# EAGLE board CT_schematic (EAGLE 7.6.0)

Size 100 x 80 mm. Coordinates in mm from the lower left corner, seen from the top.
Outline: 0,0 100,0 100,80 0,80 0,0
Copper layers (1*16): Top 0.035mm / dielectric 1.5mm / Bottom 0.035mm
Design rules "default": minimum track width 10mil, minimum drill 24mil, track to track 8mil, track to pad 8mil, pad to pad 8mil, via to via 8mil, smd to smd 8mil, copper to edge 40mil, drill to drill 8mil, minimum pad ring 10mil, minimum via ring 8mil, stop-mask expansion 4mil, vias tented up to drill 0mil, thermal gap 10mil

## Footprints (pad centres in the part's own frame; a part is rotated, then mirrored left to right if it is on the bottom)
C0603 = smd 0.8 x 0.8: 1 -0.762,0; 2 0.762,0
C0402 = smd 0.5 x 0.5: 1 -0.508,0; 2 0.508,0
C0805 = smd 1.2 x 1.3: 1 -1.016,0; 2 1.016,0
C1210 = smd 1.2 x 2.5: 1 -1.524,0; 2 1.524,0
R0603 = smd 0.8 x 0.8: 1 -0.762,0; 2 0.762,0
C1206 = smd 1.3 x 1.6: 1 -1.524,0; 2 1.524,0
L0603 = smd 0.8 x 0.8: 1 -0.762,0; 2 0.762,0
L1210 = smd 1.2 x 2.5: 1 -1.524,0; 2 1.524,0
DR1040 = smd 1.6 x 3.2: 1 -4.458,0; 2 4.458,0
UFBGA100 = smd 0.28 x 0.28: A1 -2.75,2.75; A2 -2.25,2.75; A3 -1.75,2.75; A4 -1.25,2.75; A5 -0.75,2.75; A6 -0.25,2.75; A7 0.25,2.75; A8 0.75,2.75; A9 1.25,2.75; A10 1.75,2.75; A11 2.25,2.75; A12 2.75,2.75; B1 -2.75,2.25; B2 -2.25,2.25; B3 -1.75,2.25; B4 -1.25,2.25; B5 -0.75,2.25; B6 -0.25,2.25; B7 0.25,2.25; B8 0.75,2.25; B9 1.25,2.25; B10 1.75,2.25; B11 2.25,2.25; B12 2.75,2.25; C1 -2.75,1.75; C2 -2.25,1.75; C3 -1.75,1.75; C4 -1.25,1.75; C5 -0.75,1.75; C8 0.75,1.75; C9 1.25,1.75; C10 1.75,1.75; C11 2.25,1.75; C12 2.75,1.75; D1 -2.75,1.25; D2 -2.25,1.25; D3 -1.75,1.25; D10 1.75,1.25; D11 2.25,1.25; D12 2.75,1.25; E1 -2.75,0.75; E2 -2.25,0.75; E3 -1.75,0.75; E10 1.75,0.75; E11 2.25,0.75; E12 2.75,0.75; F1 -2.75,0.25; F2 -2.25,0.25; F11 2.25,0.25; F12 2.75,0.25; G1 -2.75,-0.25; G2 -2.25,-0.25; G11 2.25,-0.25; G12 2.75,-0.25; H1 -2.75,-0.75; H2 -2.25,-0.75; H3 -1.75,-0.75; H10 1.75,-0.75; H11 2.25,-0.75; H12 2.75,-0.75; J1 -2.75,-1.25; J2 -2.25,-1.25; J3 -1.75,-1.25; J10 1.75,-1.25; J11 2.25,-1.25; J12 2.75,-1.25; K1 -2.75,-1.75; K2 -2.25,-1.75; K3 -1.75,-1.75; K4 -1.25,-1.75; K5 -0.75,-1.75; K8 0.75,-1.75; K9 1.25,-1.75; K10 1.75,-1.75; K11 2.25,-1.75; K12 2.75,-1.75; L1 -2.75,-2.25; L2 -2.25,-2.25; L3 -1.75,-2.25; L4 -1.25,-2.25; L5 -0.75,-2.25; L6 -0.25,-2.25; L7 0.25,-2.25; L8 0.75,-2.25; L9 1.25,-2.25; L10 1.75,-2.25; L11 2.25,-2.25; L12 2.75,-2.25; M1 -2.75,-2.75; M2 -2.25,-2.75; M3 -1.75,-2.75; M4 -1.25,-2.75; M5 -0.75,-2.75; M6 -0.25,-2.75; M7 0.25,-2.75; M8 0.75,-2.75; M9 1.25,-2.75; M10 1.75,-2.75; M11 2.25,-2.75; M12 2.75,-2.75
SOIC-8 = smd 1.6 x 0.6: 1 -2.7,1.905 | smd 1.55 x 0.6: 2 -2.7,0.635; 3 -2.7,-0.635; 4 -2.7,-1.905; 5 2.7,-1.905; 6 2.7,-0.635; 7 2.7,0.635; 8 2.7,1.905
TDFN-8/6MM = smd 0.3 x 0.75: 1 0,0; 2 0.5,0; 3 1,0; 4 1.5,0; 5 1.5,3; 6 1,3; 7 0.5,3; 8 0,3
182-009-MALE = drill 1.194 pad 1.524 octagon: 1 -5.537,10.923; 2 -2.769,10.923; 3 0,10.923; 4 2.769,10.923; 5 5.537,10.923; 6 -4.153,8.08; 7 -1.384,8.08; 8 1.384,8.08; 9 4.153,8.08 | hole 3.048: -12.446,9.501; 12.446,9.501
FCI_10118193-0001LF = smd 0.4 x 1.35: 1 -1.3,2.675; 2 -0.65,2.675; 3 0,2.675; 4 0.65,2.675; 5 1.3,2.675 | smd 1.6 x 1.4: 6 -3.2,2.45; 7 3.2,2.45 | smd 1.9 x 1.9: 8 -1.2,0; 9 1.2,0 | hole 0.5: -3.3,0; 3.3,0
SOT143B = smd 1 x 0.7: 1 -0.75,-1 | smd 0.6 x 0.7: 2 0.95,-1; 3 0.95,1; 4 -0.95,1
ABS07-32.768KHZ-7-T = smd 1.1 x 2.4: 1 -2.5,0; 2 0,0
ABLS-25.000MHZ-B2F-T = smd 5.6 x 2.8: 1 -3.81,0; 2 5.69,0
TSOT-23-5 = smd 1.3 x 0.62: 1 -1.31,0.95; 2 -1.31,0; 3 -1.31,-0.95; 4 1.31,-0.95; 5 1.31,0.95
DFN-8_DDB = smd 0.805 x 0.3: 1 -0.952,0.75; 2 -0.952,0.25; 3 -0.952,-0.25; 4 -0.952,-0.75; 5 0.952,-0.75; 6 0.952,-0.25; 7 0.952,0.25; 8 0.952,0.75 | smd 0.61 x 2.2: 9 0,0
DFN8_2X3MC = smd 0.813 x 0.305: 1 -1.398,0.75; 2 -1.398,0.25; 3 -1.398,-0.25; 4 -1.398,-0.75; 5 1.398,-0.75; 6 1.398,-0.25; 7 1.398,0.25; 8 1.398,0.75 | smd 1.753 x 1.549: 9 0,0
JST-2-SMD = smd 1 x 4.6: 1 -1,-3.7; 2 1,-3.7 | smd 1.6 x 3.4: NC1 -3.4,1.5; NC2 3.4,1.5
QFN-38_UHF = smd 0.75 x 0.3: 1 -2.4,2.75; 2 -2.4,2.25; 3 -2.4,1.75; 4 -2.4,1.25; 6 -2.4,0.25; 7 -2.4,-0.25; 8 -2.4,-0.75; 9 -2.4,-1.25; 10 -2.4,-1.75; 11 -2.4,-2.25; 12 -2.4,-2.75; 20 2.4,-2.75; 21 2.4,-2.25; 22 2.4,-1.75; 23 2.4,-1.25; 24 2.4,-0.75; 25 2.4,-0.25; 26 2.4,0.25; 27 2.4,0.75; 28 2.4,1.25; 29 2.4,1.75; 30 2.4,2.25; 31 2.4,2.75 | smd 0.758 x 0.3: 5 -2.4,0.75 | smd 0.3 x 0.75: 13 -1.5,-3.4; 14 -1,-3.4; 15 -0.5,-3.4; 16 0,-3.4; 17 0.5,-3.4; 18 1,-3.4; 19 1.5,-3.4; 32 1.5,3.4; 33 1,3.4; 34 0.5,3.4; 35 0,3.4; 36 -0.5,3.4; 37 -1,3.4; 38 -1.5,3.4 | smd 3.2 x 5.2: 39 0,0
IRF8306MTRPBF = smd 0.9 x 1.85: 1 0,0; 2 0,-2.35; 6 6.4,0; 7 6.4,-2.35 | smd 0.75 x 0.75: 3 1.75,-1.175 | smd 1.45 x 0.87: 4 3.5,-0.565; 5 3.5,-1.785
SW_4-1437565-2 = smd 1.4 x 2.1: 1 -2.23,4.55; 2 -2.23,-4.55; 3 2.23,4.55; 4 2.23,-4.55
LGM67K-G1J2-24-Z = smd 0.8 x 1.4: A -2,0; C 0,0
NC7SZ125M5X = smd 1.3 x 0.7: 1 -1.3,0.95; 2 -1.3,0; 3 -1.3,-0.95; 4 1.3,-0.95; 5 1.3,0.95

## Placement (x,y rotation side)
C1  1e-06  [C0603]  -49.53,78.74 0 top  (outside the outline)
C2  1e-07  [C0603]  -53.34,78.74 0 top  (outside the outline)
C3  1e-07  [C0603]  -57.15,78.74 0 top  (outside the outline)
C4  1e-07  [C0603]  -60.96,78.74 0 top  (outside the outline)
C5  1e-07  [C0603]  -64.77,78.74 0 top  (outside the outline)
C6  1e-07  [C0603]  -68.58,78.74 0 top  (outside the outline)
C7  1e-07  [C0603]  -72.39,78.74 0 top  (outside the outline)
C8  4.7e-06  [C0603]  -34.29,78.74 0 top  (outside the outline)
C9  1e-08  [C0603]  -76.2,78.74 0 top  (outside the outline)
C10  1e-06  [C0603]  -80.01,78.74 0 top  (outside the outline)
C11  1e-07  [C0402]  -53.34,83.82 0 top  (outside the outline)
C12  1e-07  [C0402]  -57.15,83.82 0 top  (outside the outline)
C13  1e-11  [C0402]  -60.96,83.82 0 top  (outside the outline)
C14  1e-11  [C0402]  -64.77,83.82 0 top  (outside the outline)
C15  1e-11  [C0402]  -68.58,83.82 0 top  (outside the outline)
C16  1e-11  [C0402]  -72.39,83.82 0 top  (outside the outline)
C17  1e-06  [C0603]  -15.24,83.82 0 top  (outside the outline)
C18  1e-08  [C0402]  -76.2,83.82 0 top  (outside the outline)
C19  1e-08  [C0402]  -80.01,83.82 0 top  (outside the outline)
C20  1e-08  [C0402]  -83.82,83.82 0 top  (outside the outline)
C21  1e-08  [C0402]  -15.24,88.9 0 top  (outside the outline)
C22  1e-06  [C0603]  -19.05,83.82 0 top  (outside the outline)
C23  1e-06  [C0603]  -22.86,83.82 0 top  (outside the outline)
C24  1e-05  [C0805]  -21.59,62.23 0 top  (outside the outline)
C25  1e-05  [C0805]  -26.67,62.23 0 top  (outside the outline)
C26  1e-05  [C0805]  -31.75,62.23 0 top  (outside the outline)
C27  1e-05  [C0805]  -36.83,62.23 0 top  (outside the outline)
C28  1e-05  [C1210]  -48.26,55.88 0 top  (outside the outline)
C29  2.2e-06  [C0603]  -38.1,78.74 0 top  (outside the outline)
C30  2.2e-07  [C0603]  -41.91,78.74 0 top  (outside the outline)
C31  1e-05  [C0805]  -41.91,62.23 0 top  (outside the outline)
C32  1e-05  [C0805]  -46.99,62.23 0 top  (outside the outline)
C33  1e-07  [C0402]  -19.05,88.9 0 top  (outside the outline)
C34  2.2e-06  [C0603]  -45.72,78.74 0 top  (outside the outline)
C35  2.45e-08  [R0603]  -57.15,68.58 0 top  (outside the outline)
C36  2.8258362168397e-09  [R0603]  -76.2,62.23 0 top  (outside the outline)
C37  7.105e-09  [R0603]  -36.83,68.58 0 top  (outside the outline)
C38  1e-05  [C1206]  -73.66,55.88 0 top  (outside the outline)
C39  1e-05  [C1206]  -80.01,55.88 0 top  (outside the outline)
C40  1e-08  [C0402]  -22.86,88.9 0 top  (outside the outline)
F1  240.0  [L0603]  -26.67,83.82 0 top  (outside the outline)
I1  3.3e-05  [L1210]  -54.61,55.88 0 top  (outside the outline)
I2  7e-06  [DR1040]  -35.56,27.94 0 top  (outside the outline)
I3  1e-05  [L1210]  -60.96,55.88 0 top  (outside the outline)
I4  3.3e-05  [L1210]  -67.31,55.88 0 top  (outside the outline)
R2  1000.0  [R0603]  -30.48,83.82 0 top  (outside the outline)
R7  4700.0  [R0603]  -34.29,83.82 0 top  (outside the outline)
R8  2200.0  [R0603]  -38.1,83.82 0 top  (outside the outline)
R10  2200.0  [R0603]  -41.91,83.82 0 top  (outside the outline)
R12  10000.0  [R0603]  -62.23,68.58 0 top  (outside the outline)
R13  10000.0  [R0603]  -67.31,68.58 0 top  (outside the outline)
R14  10000.0  [R0603]  -72.39,68.58 0 top  (outside the outline)
R15  10000.0  [R0603]  -77.47,68.58 0 top  (outside the outline)
R16  10000.0  [R0603]  -82.55,68.58 0 top  (outside the outline)
R17  10000.0  [R0603]  -15.24,73.66 0 top  (outside the outline)
R18  10000.0  [R0603]  -20.32,73.66 0 top  (outside the outline)
R19  10000.0  [R0603]  -25.4,73.66 0 top  (outside the outline)
R20  10000.0  [R0603]  -30.48,73.66 0 top  (outside the outline)
R21  10000.0  [R0603]  -35.56,73.66 0 top  (outside the outline)
R22  10000.0  [R0603]  -40.64,73.66 0 top  (outside the outline)
R23  10000.0  [R0603]  -45.72,73.66 0 top  (outside the outline)
R24  120.0  [R0603]  -45.72,83.82 0 top  (outside the outline)
R25  1000000.0  [R0603]  -81.28,62.23 0 top  (outside the outline)
R26  1000000.0  [R0603]  -16.51,68.58 0 top  (outside the outline)
R27  490000.0  [R0603]  -41.91,68.58 0 top  (outside the outline)
R28  1000000.0  [R0603]  -21.59,68.58 0 top  (outside the outline)
R29  100000.0  [R0603]  -46.99,68.58 0 top  (outside the outline)
R30  560000.0  [R0603]  -52.07,68.58 0 top  (outside the outline)
R31  1000000.0  [R0603]  -26.67,68.58 0 top  (outside the outline)
R32  1000000.0  [R0603]  -31.75,68.58 0 top  (outside the outline)
R33  10000.0  [R0603]  -50.8,73.66 0 top  (outside the outline)
R34  75000.0  [R0603]  -55.88,73.66 0 top  (outside the outline)
R35  10000.0  [R0603]  -60.96,73.66 0 top  (outside the outline)
R36  10000.0  [R0603]  -66.04,73.66 0 top  (outside the outline)
R37  95300.0  [R0603]  -71.12,73.66 0 top  (outside the outline)
R38  95300.0  [R0603]  -76.2,73.66 0 top  (outside the outline)
R39  10000.0  [R0603]  -81.28,73.66 0 top  (outside the outline)
R40  10000.0  [R0603]  -15.24,78.74 0 top  (outside the outline)
R41  10000.0  [R0603]  -20.32,78.74 0 top  (outside the outline)
R42  24000.0  [R0603]  -25.4,78.74 0 top  (outside the outline)
R43  2000.0  [R0603]  -49.53,83.82 0 top  (outside the outline)
R44  10000.0  [R0603]  -30.48,78.74 0 top  (outside the outline)
U1  STM32F412VGH6  [UFBGA100]  -25.4,27.94 0 top  (outside the outline)
U2  AT25080B-SSHL-T  [SOIC-8]  -24.13,38.1 0 top  (outside the outline)
U3  AT25320B-SSHL-T  [SOIC-8]  -40.64,38.1 0 top  (outside the outline)
U4  AT25512N-SH-T  [SOIC-8]  -54.61,38.1 0 top  (outside the outline)
U5  24AA08T-I/MNY  [TDFN-8/6MM]  -67.31,26.67 0 top  (outside the outline)
U6  MCP2562-E/SN  [SOIC-8]  -68.58,38.1 0 top  (outside the outline)
U7  182-009-113R531  [182-009-MALE]  -36.83,6.35 0 top  (outside the outline)
U8  10118193-0001LF  [FCI_10118193-0001LF]  -49.53,46.99 0 top  (outside the outline)
U9  prtr5v0u2ax  [SOT143B]  -41.91,88.9 0 top  (outside the outline)
U10  ABS07-32.768KHZ-7-T  [ABS07-32.768KHZ-7-T]  -27.94,55.88 0 top  (outside the outline)
U11  ABLS-25.000MHZ-B2F-T  [ABLS-25.000MHZ-B2F-T]  -77.47,46.99 0 top  (outside the outline)
U12  ltc3406es5  [TSOT-23-5]  -52.07,60.96 0 top  (outside the outline)
U13  ltc3406es5  [TSOT-23-5]  -58.42,60.96 0 top  (outside the outline)
U14  LT3494AEDDB#TRMPBF  [DFN-8_DDB]  -26.67,88.9 0 top  (outside the outline)
U15  ltc3406es5  [TSOT-23-5]  -64.77,60.96 0 top  (outside the outline)
U16  MCP73831T-2ACI/MC  [DFN8_2X3MC]  -45.72,87.63 0 top  (outside the outline)
U17  S2B-PH-SM4-TB(LF)(SN)  [JST-2-SMD]  -50.8,29.21 0 top  (outside the outline)
U18  LTC2928CUHF#PBF  [QFN-38_UHF]  -58.42,46.99 0 top  (outside the outline)
U19  IRF8306MTRPbF  [IRF8306MTRPBF]  -26.67,48.26 0 top  (outside the outline)
U20  IRF8306MTRPbF  [IRF8306MTRPBF]  -41.91,48.26 0 top  (outside the outline)
U21  4-1437565-2  [SW_4-1437565-2]  -67.31,6.35 0 top  (outside the outline)
U22  Q65110A2395  [LGM67K-G1J2-24-Z]  -36.83,55.88 0 top  (outside the outline)
U23  nc7sz125m5x  [NC7SZ125M5X]  -15.24,62.23 0 top  (outside the outline)

## Library data of the parts
C1-C40 F1 I1-I4 R2 R7 R8 R10 R12-R44 U1-U23 = circuit_tree

## Nets
CLK_CRYSTAL_U1_D1: C13.1 U1.D1 U10.1
CLK_CRYSTAL_U1_E1: C14.1 U1.E1 U10.2
CLK_CRYSTAL_U1_F1: C15.1 U1.F1 U11.1
CLK_CRYSTAL_U1_G1: C16.1 U1.G1 U11.2
GND: C1.2 C2.2 C3.2 C4.2 C5.2 C6.2 C7.2 C8.2 C9.2 C10.2 C11.2 C12.2 C13.2 C14.2 C15.2 C16.2 C17.2 C18.2 C19.2 C20.2 C21.2 C22.2 C23.2 C24.2 C25.1 C25.2 C26.2 C27.1 C27.2 C28.2 C29.2 C30.2 C31.2 C32.1 C32.2 C33.2 C34.2 C35.2 C36.2 C37.2 C38.2 C39.2 C40.2 R2.2 R12.2 R13.2 R25.2 R27.2 R31.2 R34.2 R37.2 R38.2 R39.2 R40.2 R41.2 R43.2 U1.B12 U1.D3 U1.F2 U1.F11 U1.F12 U1.J1 U1.K1 U2.4 U3.4 U4.4 U5.4 U6.2 U6.8 U7.5 U8.5 U8.6 U8.7 U8.8 U8.9 U9.1 U12.2 U13.2 U14.2 U14.9 U15.2 U16.6 U16.9 U17.2 U18.8 U18.9 U18.10 U18.12 U18.13 U18.24 U18.25 U18.30 U18.32 U18.39 U22.C U23.1 U23.3
INPUT_USBPOWER_5V: C17.1 C38.1 R44.2 U1.D10 U8.1 U9.4 U16.1 U16.2
NET_U1_A3: R8.1 U1.A3 U5.6
NET_U1_A4: R12.1 U1.A4
NET_U1_B3: R10.1 U1.B3 U5.5
NET_U1_C11: C12.1 U1.C11
NET_U1_E3: R14.1 U1.E3
NET_U1_H2: R7.1 U1.H2 U23.4
NET_U1_H3: R13.1 U1.H3
NET_U1_M1: C9.1 C10.1 F1.1 U1.L1 U1.M1
NET_U1_M11: U22.A
NET_U1_M12: U21.3 U21.4
NET_U2_3: R15.1 U2.3
NET_U2_7: R17.1 U2.7
NET_U3_3: R18.1 U3.3
NET_U3_7: R20.1 U3.7
NET_U4_3: R21.1 U4.3
NET_U4_7: R23.1 U4.7
NET_U6_6: R24.2 U6.6
NET_U7_2: R24.2 U6.6 U7.2
NET_U7_3: R24.1 U6.7 U7.3
NET_U12_1: U12.1
NET_U12_3: I1.1 U12.3
NET_U12_5: R25.1 R26.1 U12.5
NET_U12_ATNET_3: I1.2 R26.2
NET_U13_1: U13.1
NET_U13_3: I2.1 U13.3
NET_U13_5: R27.1 R28.1 U13.5
NET_U13_ATNET_3: I2.2 R28.2
NET_U14_1: I3.1 U14.1
NET_U14_5: R29.1 U14.5
NET_U14_6: R30.1 U14.6
NET_U14_8: C30.1 U14.8
NET_U15_1: U15.1
NET_U15_3: I4.1 U15.3
NET_U15_5: R31.1 R32.1 U15.5
NET_U15_ATNET_3: I4.2 R32.2
NET_U16_5: R44.1 U16.5
NET_U16_8: R43.1 U16.8
NET_U18_3: R40.1 U18.3
NET_U18_6: R37.1 U18.6
NET_U18_7: R38.1 U18.7
NET_U18_16: R39.1 R42.1 U18.16
NET_U18_18: R36.1 U18.18
NET_U18_19: R35.1 U18.19 U18.20
NET_U18_21: R33.1 R34.1 U18.21 U23.2
NET_U18_26: C36.1 U18.26
NET_U18_27: C35.1 U18.27
NET_U18_28: C37.1 U18.28
NET_U18_38: R41.1 U18.38
NET_U19_3: U18.2 U19.3
NET_U20_3: U18.37 U20.3
NET_U21_1: R2.1 U21.1 U21.2
PROC_CAN1_RX: U1.C9 U6.4
PROC_CAN1_TX: U1.B9 U6.1
PROC_SPI1_MISO: U1.A7 U2.2
PROC_SPI1_MOSI: U1.C5 U2.5
PROC_SPI1_NSS: R16.1 U1.A9 U2.1
PROC_SPI1_SCK: U1.A8 U2.6
PROC_SPI2_MISO: U1.J3 U4.2
PROC_SPI2_MOSI: U1.K2 U4.5
PROC_SPI2_NSS: R22.1 U1.L12 U4.1
PROC_SPI2_SCK: U1.B8 U4.6
PROC_SPI3_MISO: U1.C10 U3.2
PROC_SPI3_MOSI: U1.B6 U3.5
PROC_SPI3_NSS: R19.1 U1.M3 U3.1
PROC_SPI3_SCK: U1.B11 U3.6
PROC_USB_OTG_FS_DM: U1.B12 U8.2 U9.3
PROC_USB_OTG_FS_DP: U1.A12 U8.3 U9.2
VCC_3V7: C33.1 C34.1 C39.1 R33.2 R35.2 R36.2 R42.2 U16.3 U16.4 U17.1 U18.11 U18.22 U19.1 U19.2 U19.6 U19.7 U20.1 U20.2 U20.6 U20.7
VCC_S1_3V7: C24.1 C26.1 C28.1 I3.2 R29.2 U12.4 U13.4 U14.3 U14.4 U19.4 U19.5
VCC_S2_3V7: C31.1 U15.4 U20.4 U20.5
VCC_TIER1_1V2: C11.1 C25.2 I1.2 R26.2 U1.L11
VCC_TIER1_1V8: C1.1 C2.1 C3.1 C4.1 C5.1 C6.1 C7.1 C8.1 C18.1 C19.1 C20.1 C21.1 C23.1 C27.2 C40.1 F1.2 I2.2 R7.2 R8.2 R10.2 R14.2 R15.2 R16.2 R17.2 R18.2 R19.2 R20.2 R21.2 R22.2 R23.2 R28.2 U1.C4 U1.E2 U1.G2 U1.G11 U1.G12 U2.8 U3.8 U4.8 U5.7 U5.8 U6.5 U23.5
VCC_TIER1_5V0: C22.1 C29.1 R30.2 U6.3 U14.7
VCC_TIER2_1V2: C32.2 I4.2 R32.2

## Tracks (layer width: path | path; a pad name or v marks a point on that pad's centre or on a via)
CLK_CRYSTAL_U1_D1  (2 unrouted)
CLK_CRYSTAL_U1_E1  (2 unrouted)
CLK_CRYSTAL_U1_F1  (2 unrouted)
CLK_CRYSTAL_U1_G1  (2 unrouted)
GND  (96 unrouted)
INPUT_USBPOWER_5V  (7 unrouted)
NET_U1_A3  (2 unrouted)
NET_U1_A4  (1 unrouted)
NET_U1_B3  (2 unrouted)
NET_U1_C11  (1 unrouted)
NET_U1_E3  (1 unrouted)
NET_U1_H2  (2 unrouted)
NET_U1_H3  (1 unrouted)
NET_U1_M1  (4 unrouted)
NET_U1_M12  (1 unrouted)
NET_U2_3  (1 unrouted)
NET_U2_7  (1 unrouted)
NET_U3_3  (1 unrouted)
NET_U3_7  (1 unrouted)
NET_U4_3  (1 unrouted)
NET_U4_7  (1 unrouted)
NET_U6_6  (1 unrouted)
NET_U7_2  (2 unrouted)
NET_U7_3  (2 unrouted)
NET_U12_3  (1 unrouted)
NET_U12_5  (2 unrouted)
NET_U12_ATNET_3  (1 unrouted)
NET_U13_3  (1 unrouted)
NET_U13_5  (2 unrouted)
NET_U13_ATNET_3  (1 unrouted)
NET_U14_1  (1 unrouted)
NET_U14_5  (1 unrouted)
NET_U14_6  (1 unrouted)
NET_U14_8  (1 unrouted)
NET_U15_3  (1 unrouted)
NET_U15_5  (2 unrouted)
NET_U15_ATNET_3  (1 unrouted)
NET_U16_5  (1 unrouted)
NET_U16_8  (1 unrouted)
NET_U18_3  (1 unrouted)
NET_U18_6  (1 unrouted)
NET_U18_7  (1 unrouted)
NET_U18_16  (2 unrouted)
NET_U18_18  (1 unrouted)
NET_U18_19  (2 unrouted)
NET_U18_21  (3 unrouted)
NET_U18_26  (1 unrouted)
NET_U18_27  (1 unrouted)
NET_U18_28  (1 unrouted)
NET_U18_38  (1 unrouted)
NET_U19_3  (1 unrouted)
NET_U20_3  (1 unrouted)
NET_U21_1  (2 unrouted)
PROC_CAN1_RX  (1 unrouted)
PROC_CAN1_TX  (1 unrouted)
PROC_SPI1_MISO  (1 unrouted)
PROC_SPI1_MOSI  (1 unrouted)
PROC_SPI1_NSS  (2 unrouted)
PROC_SPI1_SCK  (1 unrouted)
PROC_SPI2_MISO  (1 unrouted)
PROC_SPI2_MOSI  (1 unrouted)
PROC_SPI2_NSS  (2 unrouted)
PROC_SPI2_SCK  (1 unrouted)
PROC_SPI3_MISO  (1 unrouted)
PROC_SPI3_MOSI  (1 unrouted)
PROC_SPI3_NSS  (2 unrouted)
PROC_SPI3_SCK  (1 unrouted)
PROC_USB_OTG_FS_DM  (2 unrouted)
PROC_USB_OTG_FS_DP  (2 unrouted)
VCC_3V7  (19 unrouted)
VCC_S1_3V7  (10 unrouted)
VCC_S2_3V7  (3 unrouted)
VCC_TIER1_1V2  (4 unrouted)
VCC_TIER1_1V8  (42 unrouted)
VCC_TIER1_5V0  (4 unrouted)
VCC_TIER2_1V2  (2 unrouted)